# Altium PCB Toradex_Colibri 5.0.PcbDoc (part 1 of 2)
Units mm, origin at the board's own origin, x right, y up, seen from the top; angles counter-clockwise.
Board outline 200 x 150 mm, 4 copper layers (Top Layer, Layer 1, Layer 2, Bottom Layer), stack 1.531 mm thick; 271 components, 262 nets, 1242 pads, 9 vias.
Unrouted connection lines stored in the file: 729.
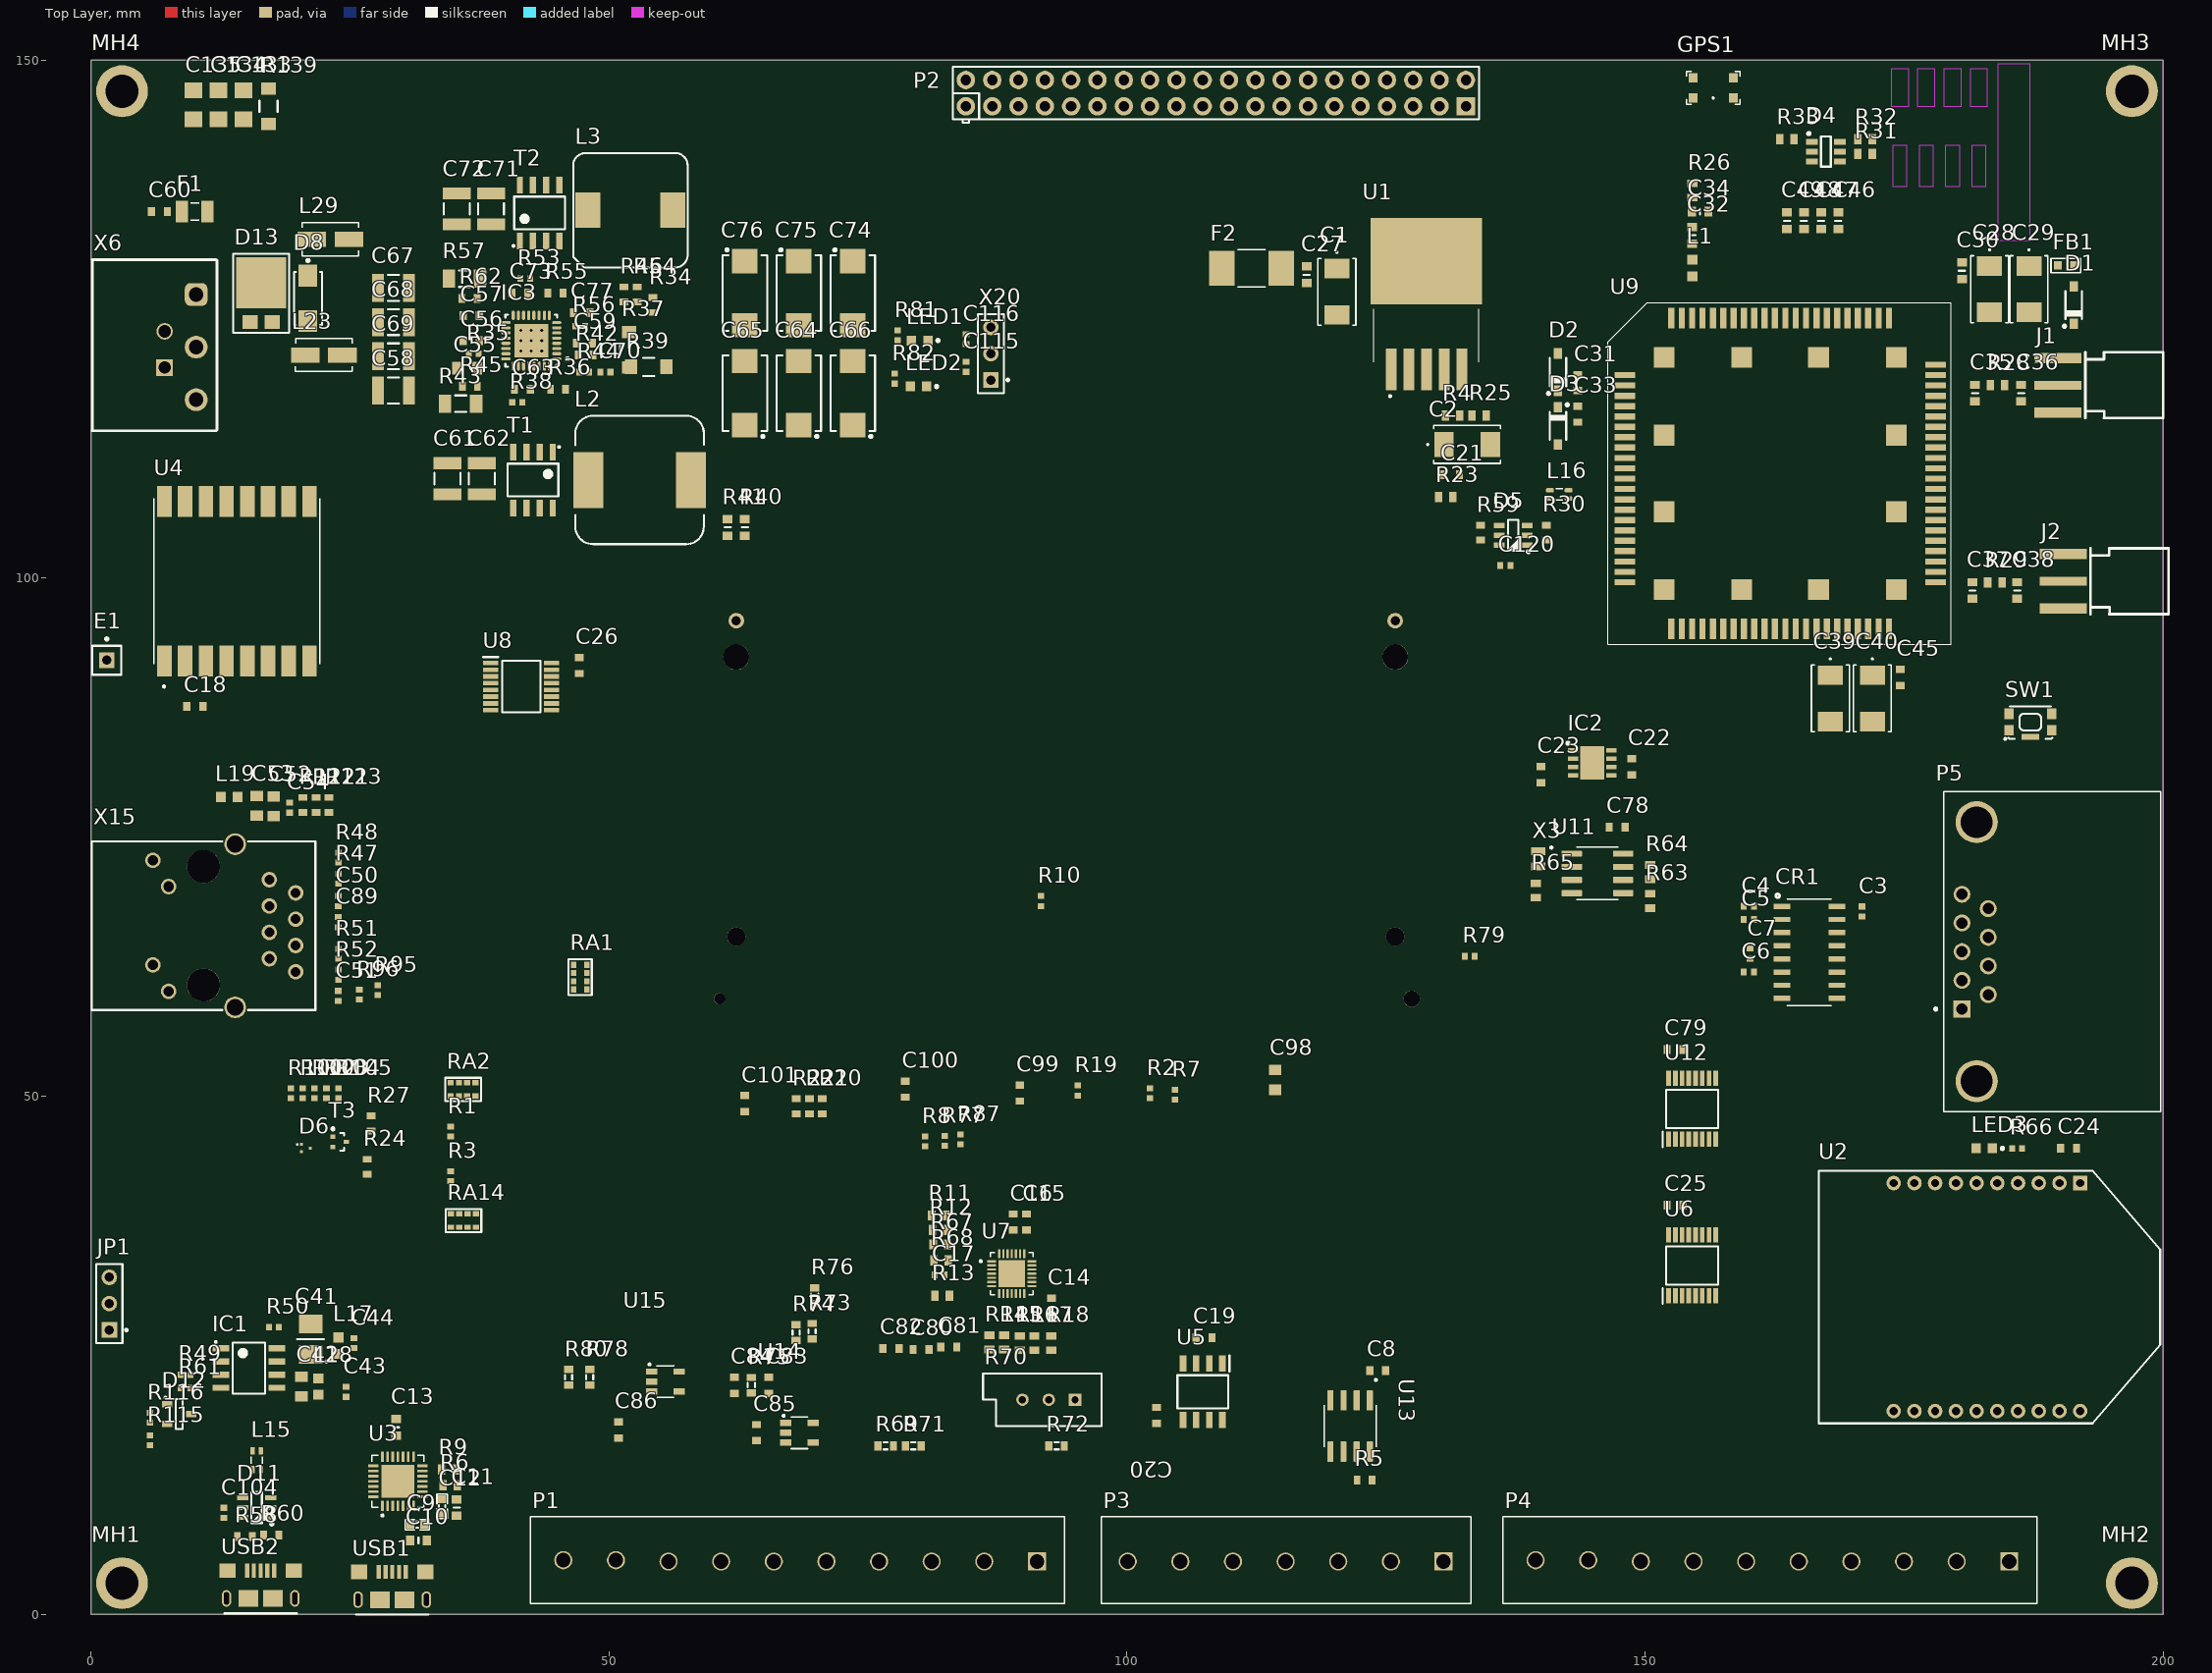
[diagram p0: Top Layer view]
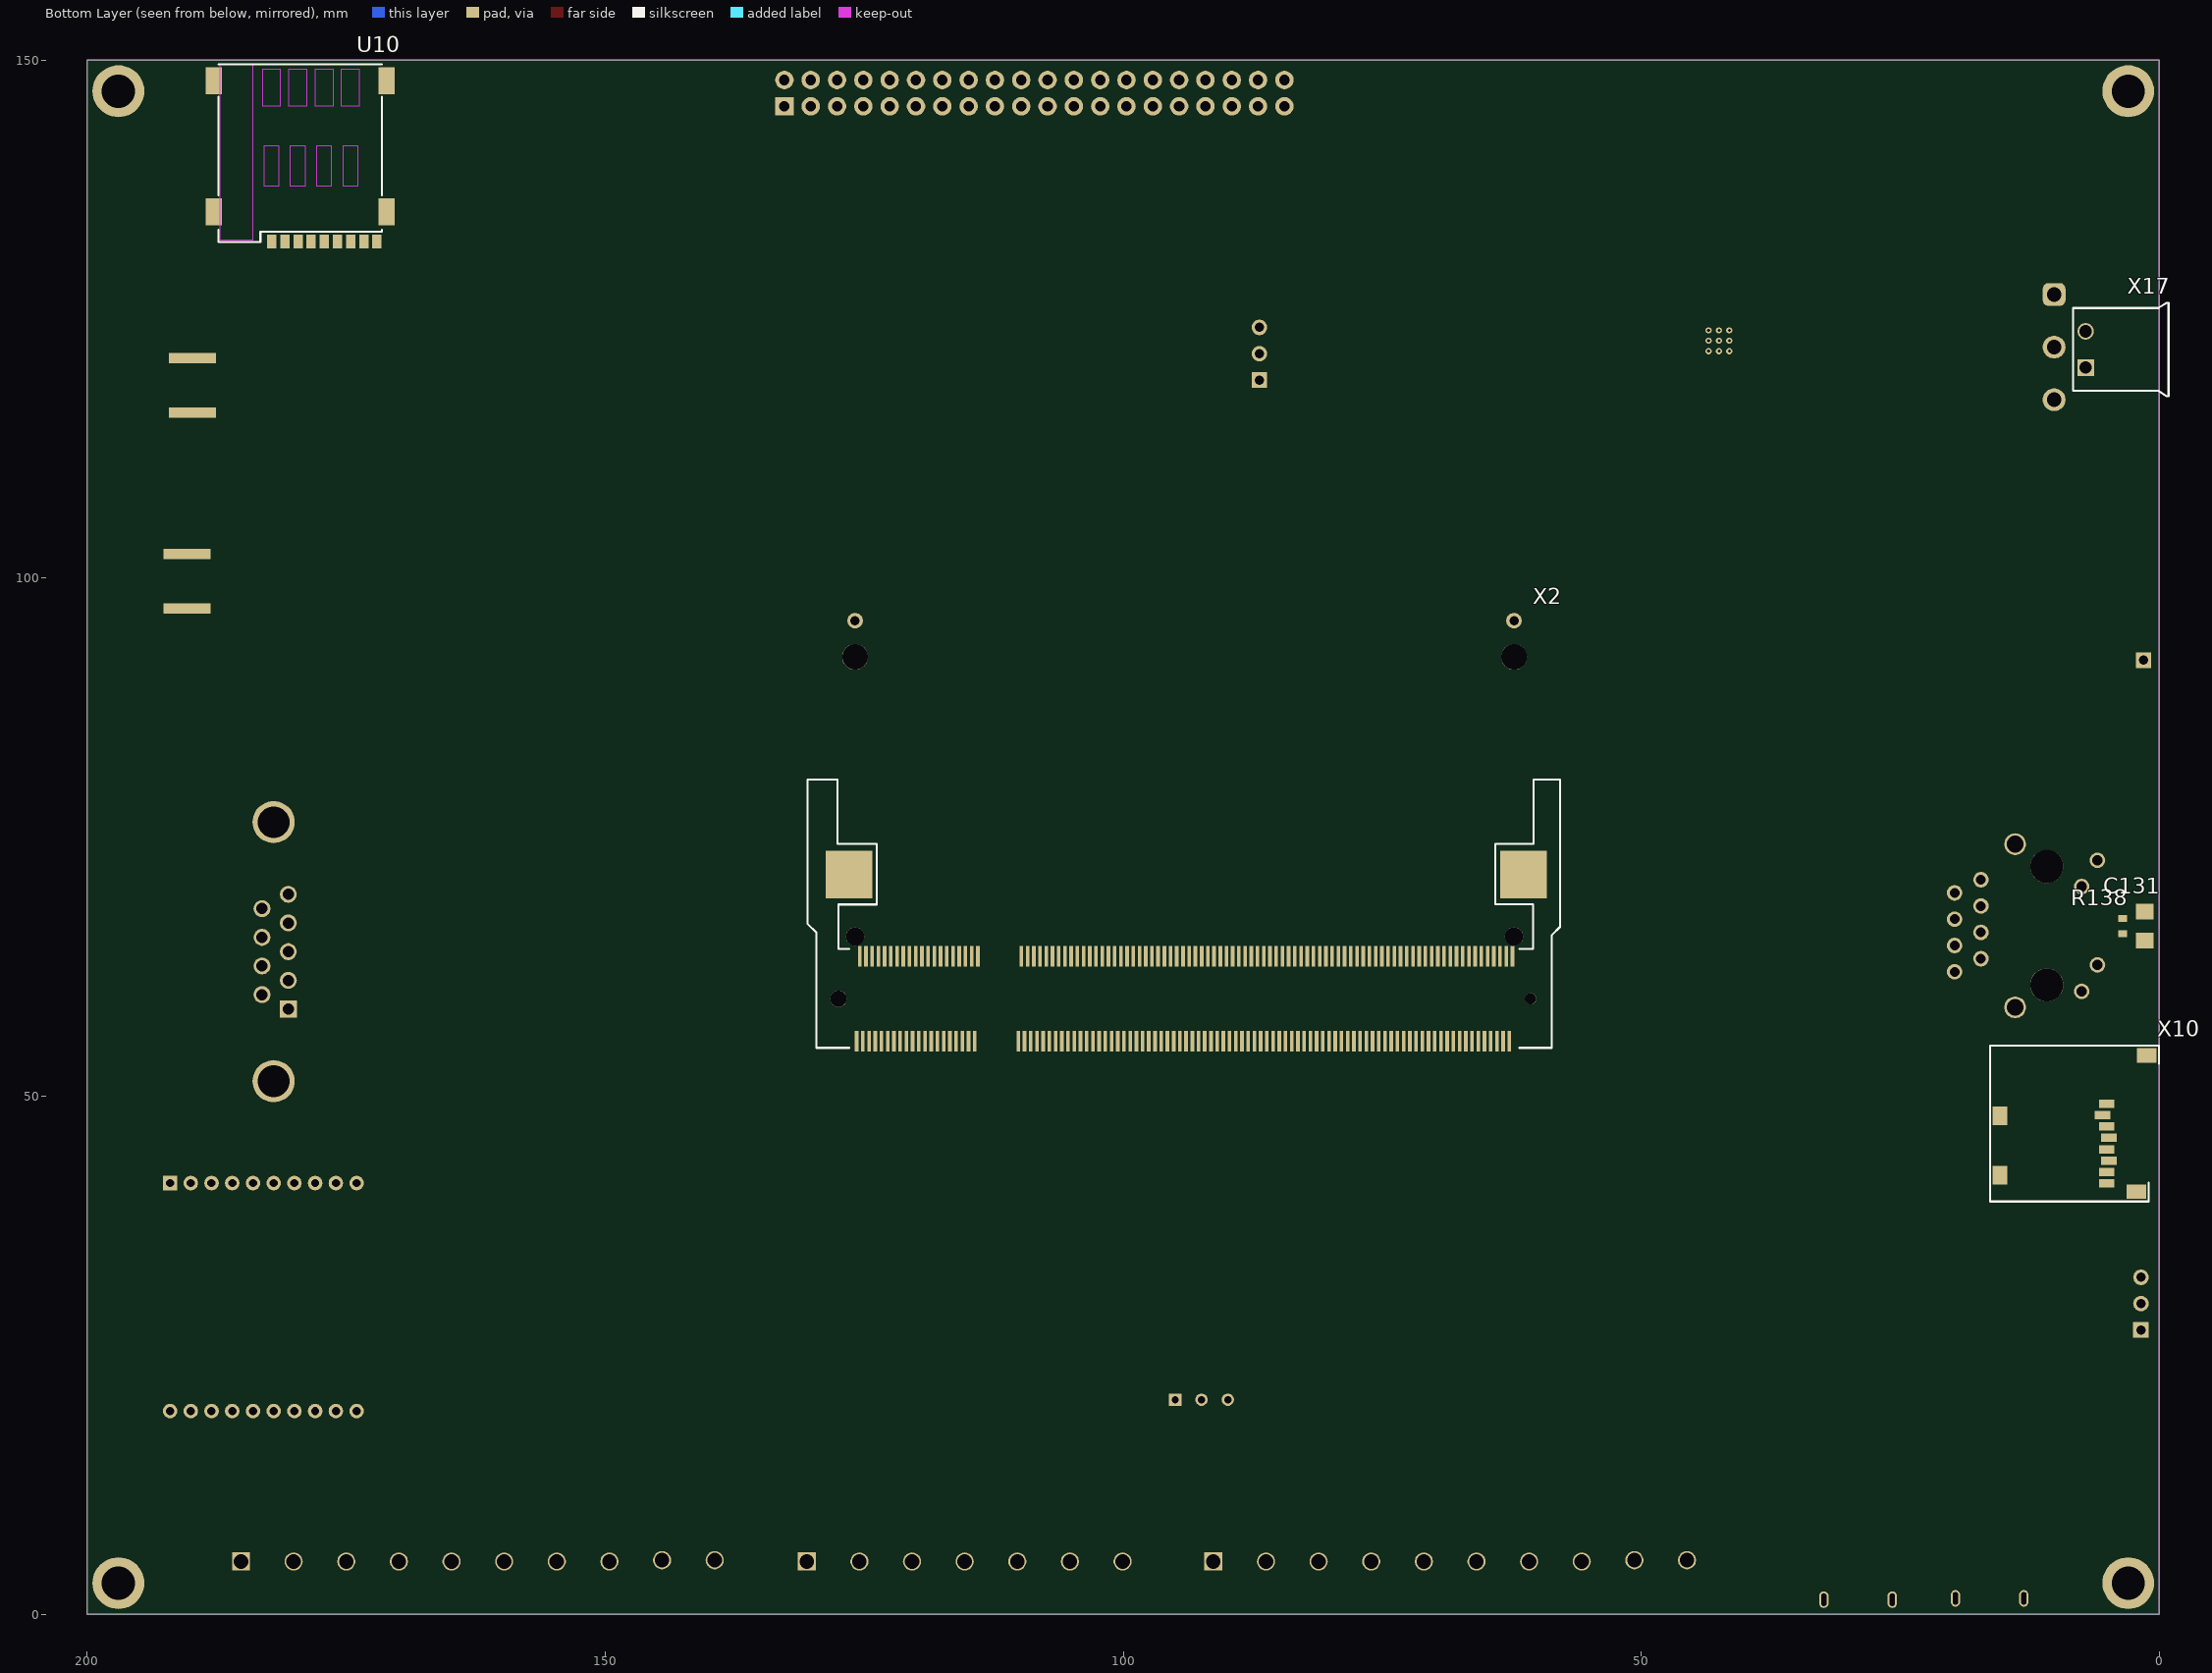
[diagram p1: Bottom Layer view, seen from below]

## Layer stack, top to bottom
Top Solder: solder mask 0.0508, Solder Resist, Dk 3.5
Top Layer: signal copper 0.047
Dielectric 2: prepreg 0.0483, PP-006, Dk 4.1
Dielectric 4: core 0.0734, Core-009, Dk 4.5
Layer 1: signal copper 0.032
Dielectric 1: dielectric 1.1298, FR-4, Dk 4.8
Layer 2: signal copper 0.032
Dielectric 5: core 0.0734, Core-009, Dk 4.5
Dielectric 3: prepreg 0.0483, PP-006, Dk 4.1
Bottom Layer: signal copper 0.047
Bottom Solder: solder mask 0.0508, Solder Resist, Dk 3.5

## Board outline
0,0 200,0 200,150 0,150

## Design rules (kind name [scope] priority, off if disabled: settings)
Clearance [All] p1: gap=0.11 ignorepadtopadclearanceinfootprint=FALSE except(0: Arc-Hole Track-Hole SMDPad-Hole THPad-Hole Via-Hole Fill-Hole Poly-Hole Region-Hole Text-Hole)
ComponentClearance [All] p1: gap=0 collisioncheckmode=3 verticalgap=0 showdistances=FALSE
DiffPairsRouting [All] p1: maxlimit=0.254 minlimit=0.254 mostfreqgap=0.254 toplayer_minwidth=0.381 toplayer_maxwidth=0.381 toplayer_prefwidth=0.381 midlayer1_minwidth=0.381 midlayer1_maxwidth=0.381 midlayer1_prefwidth=0.381 midlayer2_minwidth=0.381 midlayer2_maxwidth=0.381 midlayer2_prefwidth=0.381 bottomlayer_minwidth=0.381 bottomlayer_maxwidth=0.381 bottomlayer_prefwidth=0.381 maxuncoupledlength=12.7
PolygonConnect [All] p1: connectstyle=Relief reliefconductorwidth=0.254 reliefentries=4 polygonreliefangle="90 Angle" airgapwidth=0.254
RoutingVias [All] p1: holewidth=0.711 width=1.27 viastyle="Through Hole" minholewidth=0.711 minwidth=1.27 maxholewidth=0.711 maxwidth=1.27
SolderMaskExpansion [All] p1: expansion=0.102 istentingtop=FALSE
Width [All] p1: maxlimit=0.254 minlimit=0.254 preferedwidth=0.254
28 further rules are at their usual default settings.

## Classes and differential pairs
net class "50 Ohm": ANT_AUX ANT_GNSS ANT_MAIN NetC32_1 NetC32_2 NetC36_2 NetC38_2 NetGPS1_1
component class L506: C1 C2 C21 C27 C28 C29 C30 C31 C32 C33 C34 C35 C36 C37 C38 C39 C40 C45 C46 C47 C48 C49 D1 D2 D3 D4 F2 FB1 GPS1 J1 J2 L1 R4 R23 R25 R26 R28 R29 R31 R32 R33 U1 U9 U10
net class USB[0..6]: USB0 USB1 USB2 USB3 USB4 USB5 USB6
net class SD[0..6]: SD0 SD1 SD2 SD3 SD4 SD5 SD6
component class Zigbee: C3 C4 C5 C6 C7 C24 CR1 LED3 P3 P4 P5 R66 U2
component class USB: C41 C42 C43 C44 C104 C120 D5 D11 D12 IC1 L15 L16 L17 L18 R8 R30 R49 R50 R58 R59 R60 R61 R77 R87 R115 R116 USB2
component class SPI: C14 C15 C16 C17 C26 C80 C81 C82 P2 R11 R12 R13 R14 R15 R16 R17 R18 R67 R68 U7 U8
component class Serial: C25 C79 U6 U12
component class SDCard: D6 R1 R3 R24 R27 R101 R102 R103 R104 R105 RA2 RA14 T3 X10
component class RTC: C22 C23 C78 IC2 R63 R64 R65 RA1 U11 X3
component class PowerSupply: C55 C56 C57 C58 C59 C60 C61 C62 C63 C64 C65 C66 C67 C68 C69 C70 C71 C72 C73 C74 C75 C76 C77 C115 C116 C133 C134 C135 D8 D13 F1 IC3 L2 L3 L23 L29 LED1 LED2 MH1 MH2 MH3 MH4 R34 R35 R36 R37 R38 R39 R40 R41 R42 R43 R44 R45 R46 R53 R54 R55 R56 R57 R62 R81 R82 R139 T1 T2 X6 X17 X20
component class Other: C19 C20 U5
component class LoRa: C18 E1 U4
component class Ethernet: C50 C51 C52 C53 C54 C89 C131 L19 R47 R48 R51 R52 R95 R96 R121 R122 R123 R138 X15
component class DebugConsole: C8 C9 C10 C11 C12 C13 R5 R6 R9 U3 U13 USB1
component class Colibri: C98 C99 C100 C101 JP1 R2 R7 R10 R19 R20 R21 R22 R79 SW1 X2
component class Analog_Inputs: C83 C84 C85 C86 P1 R69 R70 R71 R72 R73 R74 R75 R76 R78 R80 U14 U15
differential pair USBH: +USBH_P -USBH_N
differential pair USBC: +USBC_P -USBC_N
differential pair USB_HOST: +USB_HOST_P -USB_HOST_N
differential pair USB_CLIENT: +USB_CLIENT_P -USB_CLIENT_N
differential pair RS485_TX: +RS485_TX_P -RS485_TX_N
differential pair RS485_RX: +RS485_RX_P -RS485_RX_N

## Components (designator, comment, footprint, x,y, rotation, side; value= is the part's Value field where it differs from the comment)
C1 "100uF" "2312 Tant" 120.269,127.635 r270 top
C2 "330uF" "2312 Tant" 132.842,112.903 r0 top
C3 "100pF" CAPC1005X60N 170.942,67.818 r270 top
C4 "100pF" CAPC1005X60N 160.02,68.326 r0 top
C5 "100pF" CAPC1005X60N 160.02,67.056 r0 top
C6 "100pF" CAPC1005X60N 160.02,61.976 r0 top
C7 "100pF" CAPC1005X60N 160.147,63.754 r90 top
C8 "100nF" T_CAPC0603X33N 124.206,23.495 r0 top
C9 "100nF" CAPC1608X06L 31.496,8.636 r0 top
C10 "4.7uF" CAPC1608X100N 31.623,7.112 r0 top
C11 "1uF" CAPC1608X100N 35.306,10.287 r270 top
C12 "100nF" CAPC1608X06L 33.896,10.414 r270 top
C13 "4.7uF" CAPC1608X100N 29.464,18.034 r90 top
C14 "100nF" T_CAPC0603X33N 92.71,29.718 r90 top
C15 "100nF" T_CAPC0603X33N 90.297,37.846 r270 top
C16 "100nF" T_CAPC0603X33N 89.027,37.846 r270 top
C17 "1nF" CAPC1005X60N 81.915,32.766 r0 top
C18 "100nF" T_CAPC0603X33N 10.033,87.63 r0 top
C19 "100nF" T_CAPC0603X33N 107.442,26.67 r180 top
C20 "100nF" T_CAPC0603X33N 102.87,19.177 r270 top
C21 "100nF" T_CAPC0603X33N 131.318,109.982 r180 top
C22 "100nF" T_CAPC0603X33N 148.717,81.788 r90 top
C23 "100nF" T_CAPC0603X33N 139.954,81.026 r90 top
C24 "100nF" T_CAPC0603X33N 190.881,44.958 r0 top
C25 "100nF" T_CAPC0603X33N 152.908,39.497 r180 top
C26 "100nF" T_CAPC0603X33N 47.117,91.567 r90 top
C27 "1uF" CAPC1608X100N 117.348,129.286 r270 top
C28 "100uF" "2312 Tant" 183.261,127.889 r270 top
C29 "100uF" "2312 Tant" 187.071,127.889 r270 top
C30 "1uF" CAPC1608X100N 180.594,129.667 r270 top
C31 "100nF" T_CAPC0603X33N 143.51,118.872 r270 top
C32 "0.8pF" CAPC1608X100N 154.559,133.096 r90 top
C33 "100nF" T_CAPC0603X33N 143.51,115.824 r90 top
C34 "5.1pF" CAPC1608X100N 155.321,135.382 r180 top
C35 "NF" CAPC1608X100N 181.864,117.856 r90 top
C36 "NF" CAPC1608X100N 186.309,117.856 r90 top
C37 "NF" CAPC1608X100N 181.61,98.806 r90 top
C38 "NF" CAPC1608X100N 185.928,98.806 r90 top
C39 "100uF" "2312 Tant" 167.894,88.392 r270 top
C40 "100uF" "2312 Tant" 171.958,88.392 r270 top
C41 "100uF" CAPMP3528X210N 21.209,26.543 r90 top
C42 "22uF" T_CAPC0805X125N 20.32,21.971 r90 top
C43 "100nF" CAPC1005X60N 24.638,21.463 r270 top
C44 "100nF" CAPC1005X60N 25.4,26.162 r90 top
C45 "100nF" T_CAPC0603X33N 174.625,90.424 r90 top
C46 "0603" CAPC1608X100N 168.656,134.493 r270 top
C47 "0603" CAPC1608X100N 167.005,134.493 r270 top
C48 "0603" CAPC1608X100N 165.354,134.493 r270 top
C49 "0603" CAPC1608X100N 163.703,134.493 r270 top
C50 "100nF" CAPC1005X60N 23.876,68.834 r90 top
C51 "100nF" CAPC1005X60N 23.876,59.672 r90 top
C52 "47uF" T_CAPC0805X125N 17.653,77.978 r270 top
C53 "47uF" T_CAPC0805X125N 16.002,78.006 r270 top
C54 "100nF" CAPC1005X60N 19.177,77.851 r270 top
C55 "10uF" T_CAPC0805X125N 36.322,120.269 r0 top
C56 "1uF" T_CAPC0603X33N 36.703,122.936 r0 top
C57 "10uF" T_CAPC0603X33N 36.703,125.349 r0 top
C58 "22uF" CAPC3225X160N 29.21,118.11 r0 top
C59 "1nF" T_CAPC0603X33N 47.625,122.682 r180 top
C60 "100nF" T_CAPC0603X33N 6.604,135.382 r0 top
C61 "10uF" CAPC3225X160N 34.417,109.601 r90 top
C62 "10uF" CAPC3225X160N 37.719,109.601 r90 top
C63 "100nF" T_CAPC0603X33N 41.656,118.237 r0 top
C64 "150uF" CAPMP7343X310N 68.326,117.856 r90 top
C65 "150uF" CAPMP7343X310N 63.119,117.856 r90 top
C66 "150uF" CAPMP7343X310N 73.533,117.856 r90 top
C67 "10uF" CAPC3225X160N 29.21,128.016 r0 top
C68 "10uF" CAPC3225X160N 29.21,124.714 r0 top
C69 "10uF" CAPC3225X160N 29.21,121.412 r0 top
C70 "2.7nF" CAPC1005X60N 49.657,119.888 r180 top
C71 "10uF" CAPC3225X160N 38.608,135.636 r90 top
C72 "10uF" CAPC3225X160N 35.306,135.636 r90 top
C73 "100nF" T_CAPC0603X33N 41.402,127.508 r0 top
C74 "150uF" CAPMP7343X310N 73.533,127.508 r270 top
C75 "150uF" CAPMP7343X310N 68.326,127.508 r270 top
C76 "150uF" CAPMP7343X310N 63.119,127.508 r270 top
C77 "1nF" T_CAPC0603X33N 47.371,125.603 r0 top
C78 "100nF" T_CAPC0603X33N 147.32,75.946 r0 top
C79 "100nF" T_CAPC0603X33N 152.908,54.483 r180 top
C80 "100nF" T_CAPC0603X33N 80.137,25.527 r180 top
C81 "100nF" T_CAPC0603X33N 82.804,25.781 r180 top
C82 "100nF" T_CAPC0603X33N 77.216,25.654 r180 top
C83 "100nF" T_CAPC0603X33N 65.405,22.098 r90 top
C84 "100nF" T_CAPC0603X33N 62.103,22.098 r270 top
C85 "100nF" T_CAPC0603X33N 64.262,17.526 r90 top
C86 "100nF" T_CAPC0603X33N 50.927,17.78 r90 top
C89 "100nF" CAPC1005X60N 23.876,66.802 r270 top
C98 "22uF" T_CAPC0805X125N 114.3,51.562 r90 top
C99 "4.7uF" T_CAPC0603X33N 89.662,50.292 r90 top
C100 "4.7uF" T_CAPC0603X33N 78.613,50.673 r90 top
C101 "4.7uF" T_CAPC0603X33N 63.119,49.276 r90 top
C104 "100nF" CAPC1005X60N 12.827,9.779 r90 top
C115 "100nF" CAPC1005X60N 84.455,120.396 r270 top
C116 "100nF" CAPC1005X60N 84.455,123.063 r270 top
C120 "100nF" CAPC1005X60N 136.525,101.219 r180 top
C131 "1nF" T_CAPC1206X180N 1.397,66.421 r90 bottom
C133 "1nF" T_CAPC1206X180N 14.732,145.669 r270 top
C134 "1nF" T_CAPC1206X180N 12.319,145.669 r270 top
C135 "1nF" T_CAPC1206X180N 9.906,145.669 r270 top
CR1 "ST3232EBDR" SO-16_STM 165.862,63.881 r0 top
D1 "MMSZ5231B-TP" SOD3715X145N 191.389,126.365 r90 top
D2 "TVS" SOD3715X145N 141.605,119.888 r90 top
D3 "TVS" SOD3715X145N 141.605,114.681 r270 top
D4 "ESDA6V1-5SC6" SOT95P280X100-6N 167.466,141.163 r0 top
D5 "RCLAMP0504S" T_SOT95P285X90-6N 137.287,104.14 r180 top
D6 "TPD2EUSB30DRTR" T_TI_TPD2EUSB30DRTR 20.745,44.989 r0 top
D8 "D-Littelfuse-SMAJ30CA-Schottky" T_LITTLEFUSE_SMAJ30CA 20.955,127 r270 top
D11 "RCLAMP0504S" T_SOT95P285X90-6N 16.002,10.287 r180 top
D12 "BAT54C" SOT95P230X110-3N 8.509,19.304 r0 top
D13 "SS8P6C-M3/86A" T_DIOM_TO277A 16.432,128.519 r270 top
E1 "142-0701-801" PIN1 1.524,92.075 r0 top
F1 "8A" T_Littelfuse_0458 10.033,135.382 r0 top
F2 "Fuse 1" SSQC_BEL 112.141,130.048 r0 top
FB1 "FBTH1608HL300-T" IND-0603 190.627,130.175 r180 top
GPS1 "1462350001" 1462350001 156.591,147.32 r0 top
IC1 "TPS2042BD" SOIC127P600X173-8N 15.24,23.749 r0 top
IC2 "A7101CHTK2_T0BC2VJ" SON80P400X400X100-9N-D 144.907,82.169 r0 top
IC3 "TPS51120" QFN50P500X500X100-33N 42.508,122.916 r180 top
J1 "EMPCB.SMAFSTJ.B.HT" EMPCB.SMAFSTJ.B.HT 189.865,118.618 r90 top
J2 "EMPCB.SMAFSTJ.B.HT" EMPCB.SMAFSTJ.B.HT 190.373,99.695 r90 top
JP1 "826936-3" T_TYCO_826936-3 1.778,27.432 r90 top
L1 "3.3nH" INDC1608X100N 154.559,129.921 r90 top
L2 "8.2uH" T_INDM120120X80N 52.959,109.474 r270 top
L3 "4.7uH" T_INDM102102X45N 52.07,135.509 r90 top
L15 "90R@100MHz" T_Murata_DLW21SN900SQ2 16.002,14.859 r270 top
L16 "90R@100MHz" T_Murata_DLW21SN900SQ2 141.732,108.077 r0 top
L17 "220R@100MHz" INDC1608X95N 23.876,25.908 r90 top
L18 "220R@100MHz" INDC1608X95N 21.971,21.971 r270 top
L19 "220R@100MHz" INDC1608X95N 13.335,78.867 r0 top
L23 "36R@100MHz" T_Laird_35F0121-0SR-10 22.479,121.539 r0 top
L29 "36R@100MHz" T_Laird_35F0121-0SR-10 23.114,132.715 r0 top
LED1 "LED" LEDC1608X80N 80.01,122.936 r180 top
LED2 "LED" LEDC1608X80N 79.883,118.491 r180 top
LED3 "LED" LEDC1608X80N 182.753,44.958 r180 top
MH1 "MECH-MountingHoles" T_MountingHoles 3,3 r0 top
MH2 "MECH-MountingHoles" T_MountingHoles 197,3 r0 top
MH3 "MECH-MountingHoles" T_MountingHoles 197,147 r0 top
MH4 "MECH-MountingHoles" T_MountingHoles 3,147 r0 top
P1 "MB612-50810" "1729186 5.08 - 10pos" 73.533,5.207 r180 top
P2 "Raspbbery Pi" RASPI_GPIO_B+ 108.585,146.812 r90 top
P3 "MB612-50807" MB612-50807 115.316,5.08 r180 top
P4 "MB612-50810" "1729186 5.08 - 10pos" 167.386,5.207 r180 top
P5 "RS232" 2301843-1 180.599,58.407 r90 top
R1 "22R" RESC1005X40N 34.722,46.579 r90 top
R2 "22R" RESC1005X40N 102.235,50.292 r270 top
R3 "22R" RESC1005X40N 34.722,42.261 r90 top
R4 "100K" RESC1608X50N 131.445,115.697 r0 top
R5 "120R" T_RESC0603X30N 122.936,12.954 r0 top
R6 "10K" RESC1608X50N 34.671,12.446 r180 top
R7 "22R" RESC1005X40N 104.648,50.137 r270 top
R8 "22R" RESC1005X40N 80.518,45.621 r270 top
R9 "10K" RESC1608X50N 34.544,13.97 r0 top
R10 "22R" RESC1005X40N 91.694,68.834 r90 top
R11 "1K" RESC1608X50N 81.843,38.481 r0 top
R12 "1K" RESC1608X50N 81.915,37.084 r0 top
R13 "1K" RESC1608X50N 82.169,30.734 r0 top
R14 "1K" RESC1608X50N 86.741,26.234 r90 top
R15 "1K" RESC1608X50N 88.138,26.234 r90 top
R16 "1K" RESC1608X50N 89.662,26.162 r90 top
R17 "1K" RESC1608X50N 91.059,26.162 r90 top
R18 "1K" RESC1608X50N 92.71,26.162 r90 top
R19 "10K" RESC1005X40N 95.25,50.546 r270 top
R20 "100R" T_RESC0603X30N 70.612,49.022 r90 top
R21 "100R" T_RESC0603X30N 69.342,49.022 r90 top
R22 "100R" T_RESC0603X30N 68.072,49.022 r90 top
R23 "470R" RESC1608X50N 130.755,107.823 r0 top
R24 "100K" T_RESC0603X30N 26.67,43.18 r90 top
R25 "47K" RESC1608X50N 133.985,115.697 r0 top
R26 "0R" RESC1608X50N 154.559,137.414 r90 top
R27 "100K" T_RESC0603X30N 27.051,47.371 r90 top
R28 "0R" RESC1608X50N 184.023,118.618 r0 top
R29 "0R" RESC1608X50N 183.769,99.568 r0 top
R30 "15K" T_RESC0603X30N 140.462,104.394 r90 top
R31 "51R" RESC1608X50N 171.251,140.97 r180 top
R32 "51R" RESC1608X50N 171.251,142.367 r180 top
R33 "51R" RESC1608X50N 163.703,142.367 r0 top
R34 "0R" T_RESC0603X30N 54.229,126.365 r90 top
R35 "4.7R" RESC1005X40N 36.957,121.666 r0 top
R36 "0R" T_RESC0603X30N 45.085,118.237 r180 top
R37 "0R" T_RESC3216X760N 51.943,122.047 r270 top
R38 "4.7R" RESC1005X40N 41.148,116.967 r180 top
R39 "0R" T_RESC3216X760N 53.848,120.396 r180 top
R40 "0R" CAPC1608X100N 63.119,104.902 r270 top
R41 "0R" CAPC1608X100N 61.468,104.902 r270 top
R42 "100K" T_RESC0603X30N 47.752,121.539 r180 top
R43 "15mR" RESC3316X76N 35.687,116.84 r180 top
R44 "6.2K" RESC1005X40N 47.625,119.888 r180 top
R45 "3.6K" T_RESC0603X30N 36.576,118.491 r180 top
R46 "0R" T_RESC0603X30N 51.435,127.381 r90 top
R47 "49.9R" RESC1005X40N 23.876,70.993 r90 top
R48 "49.9R" RESC1005X40N 23.876,73.025 r90 top
R49 "100K" RESC1005X40N 9.144,23.114 r180 top
R50 "100K" RESC1005X40N 17.653,27.686 r180 top
R51 "49.9R" RESC1005X40N 23.876,63.754 r270 top
R52 "49.9R" RESC1005X40N 23.876,61.722 r270 top
R53 "4.7R" RESC1005X40N 41.91,128.905 r0 top
R54 "0R" T_RESC0603X30N 52.705,127.381 r90 top
R55 "100K" T_RESC0603X30N 44.831,127.508 r0 top
R56 "10K" RESC1005X40N 47.216,124.333 r180 top
R57 "24mR" RESC3316X76N 36.068,128.905 r180 top
R58 "15K" T_RESC0603X30N 14.859,7.493 r0 top
R59 "15K" T_RESC0603X30N 134.112,104.394 r90 top
R60 "15K" T_RESC0603X30N 17.399,7.62 r180 top
R61 "100K" RESC1005X40N 9.144,21.844 r180 top
R62 "3.3K" T_RESC0603X30N 36.539,127 r180 top
R63 "10k" RESC1608X50N 150.495,68.834 r270 top
R64 "10k" RESC1608X50N 150.495,71.628 r90 top
R65 "10k" RESC1608X50N 139.446,69.85 r270 top
R66 "200" RESC1005X40N 185.928,44.958 r0 top
R67 "1K" RESC1608X50N 81.987,35.687 r0 top
R68 "1K" RESC1608X50N 82.042,34.163 r0 top
R69 "Res3" J1-0603 76.708,16.256 r0 top
R70 "RPot" VR5 92.456,20.701 r180 top
R71 "Res3" J1-0603 79.375,16.256 r0 top
R72 "Res3" J1-0603 93.206,16.256 r180 top
R73 "Res3" J1-0603 69.596,27.305 r270 top
R74 "Res3" J1-0603 68.072,27.178 r90 top
R75 "Res3" J1-0603 63.754,22.098 r90 top
R76 "Res3" J1-0603 69.85,30.734 r90 top
R77 "22R" RESC1005X40N 82.423,45.692 r270 top
R78 "Res3" J1-0603 48.133,22.86 r90 top
R79 "22R" RESC1005X40N 133.096,63.5 r0 top
R80 "Res3" J1-0603 46.101,22.86 r90 top
R81 "560R" RESC1005X40N 77.851,123.444 r90 top
R82 "1K" RESC1005X40N 77.597,119.253 r90 top
R87 "22R" RESC1005X40N 83.947,45.819 r270 top
R95 "150R" RESC1005X40N 27.686,60.226 r90 top
R96 "150R" RESC1005X40N 25.908,59.817 r270 top
R101 "33K" RESC1005X40N 19.304,50.292 r90 top
R102 "68K" RESC1005X40N 20.447,50.292 r90 top
R103 "68K" RESC1005X40N 21.59,50.292 r90 top
R104 "68K" RESC1005X40N 22.733,50.292 r90 top
R105 "68K" RESC1005X40N 23.876,50.292 r90 top
R115 "560R" RESC1005X40N 5.715,16.764 r90 top
R116 "1K" RESC1005X40N 5.715,18.951 r90 top
R121 "0R" T_RESC0603X30N 21.717,78.105 r90 top
R122 "0R" T_RESC0603X30N 20.447,78.105 r270 top
R123 "0R" T_RESC0603X30N 22.987,78.105 r270 top
R138 "1M" T_RESC0603X30N 3.556,66.421 r90 bottom
R139 "0R" T_RESC3216X760N 17.145,145.542 r90 top
RA1 "22R" T_Resistor_Array_X4 46.579,62.687 r0 top
RA2 "22R" T_Resistor_Array_X4 34.722,50.008 r90 top
RA14 "22R" T_Resistor_Array_X4 34.76,37.338 r90 top
SW1 "KMR211GLFS" T_CnK_KMR211GLFS 187.198,86.106 r180 top
T1 "FDS6982AS" SOIC127P600X173-8N 42.672,109.474 r270 top
T2 "FDS6982AS" SOIC127P600X173-8N 43.307,135.255 r90 top
T3 "T-DiodeInc-DMG1012T" T_SOT50P160X80-3N 24.003,45.593 r0 top
U1 "MIC29302WU" MIC29302WU 128.905,120.142 r0 top
U2 "XBP9B-DMST-002" DIP2200W51P200L3294H279Q20P 183.261,30.607 r270 top
U3 "CP2102-GM" QFN50P500X500X100-29N 29.634,12.827 r90 top
U4 "RFM95W-915S2" XCVR_RFM95W-915S2 14.097,99.695 r90 top
U5 "TLE9251VSJXUMA1" SOIC127P602X173-8N 107.315,21.463 r270 top
U6 "74CBTLV3257PGG" SOP65P640X120-16N 154.559,33.655 r90 top
U7 "MAX11410ATI+" QFN40P400X400X80-29N 88.881,32.863 r0 top
U8 "74CBTLV3257PGG" SOP65P640X120-16N 41.529,89.535 r0 top
U9 "L056" L506 163.054,110.102 r0 top
U10 "SIM7100-8-1-15-00-A_revA" SIM7100-8-1-15-00-A_revA 179.451,140.716 r0 bottom
U11 "DS1337S+T&R" SOIC127P600X175-8N 145.415,71.501 r0 top
U12 "74CBTLV3257PGG" SOP65P640X120-16N 154.559,48.768 r90 top
U13 "ISL83490IBZ" SOIC127P600X175-8N 121.539,18.161 r270 top
U14 "MCP6001RT-I/OT" SOT-23-5 68.453,17.526 r0 top
U15 "MCP6001RT-I/OT" SOT-23-5 55.499,22.479 r0 top
USB1 "10118193-0001LF" 10118193-0001LF 29.083,1.397 r0 top
USB2 "10118193-0001LF" 10118193-0001LF 16.383,1.524 r0 top
X2 "1473005-1" T_Tyco_1473005-1 125.743,55.3 r90 bottom
X3 "32.768kHz" ABS06 139.7,72.898 r90 top
X6 "RAPC722X" CTBP9358/3 10.16,122.301 r270 top
X10 "MicroSD Holder" T_Wurth_693071010811 15.78,40.336 r270 bottom
X15 "JX0011D21BNL" T_Pulse_J00-0065NL 0.073,58.316 r90 top
X17 "284512-2" T_TYCO_284512-2 -0.888,118.075 r90 bottom
X20 "826936-3" T_TYCO_826936-3 86.868,119.126 r90 top

## Footprints (in the part's own frame and the unit in brackets; to place one, negate y for a bottom-side part, rotate by r counter-clockwise, add the part's x,y. Pads: shape width x height; smd on the part's side, far side on the other; paste and mask are expansions set on the pad)
"2312 Tant" [mil]
  rect 74x95 smd: 1(-87.99,0) 2(88.01,0)
  silkscreen extent -153,-72 127,72, body extent -122,-67 122,67, height 112
"1729186 5.08 - 10pos" [mm]
  rect 1.75x1.75 hole 1.4: 1(-17.78,0.127)
  round 1.75 hole 1.4: 2(-12.7,0.127) 3(-7.62,0.127) 4(-2.54,0.127) 5(2.54,0.127) 6(7.62,0.127) 7(12.7,0.127) 8(17.78,0.127) 9(22.86,0) 10(27.94,0)
  silkscreen extent -20.45,-4.19 31.11,4.19, body extent -20.35,-4.06 31.02,4.04, height 10
2301843-1 [mm]
  rect 1.635x1.635 hole 1.09: 1(0,0)
  round 1.635 hole 1.09: 2(2.77,0) 3(5.54,0) 4(8.31,0) 5(11.08,0) 6(1.39,-2.54) 7(4.16,-2.54) 8(6.92,-2.54) 9(9.69,-2.54)
  round 4.066 hole 3.05: S1(-6.96,-1.42) S2(18.04,-1.42)
  silkscreen extent -9.91,-19.18 20.99,2.64, body extent -9.82,-19.05 20.99,1.6, height 14.41
10118193-0001LF [mm] "Connector Receptacle USB - micro B 2.0 5 Position Surface Mount, Right Angle, Horizontal"
  rect 0.4x1.35 smd: 1(-1.3,2.675) 2(-0.65,2.675) 3(0,2.675) 4(0.65,2.675) 5(1.3,2.675)
  oval 0.9x1.6 hole 0.5 slot 1.2 at 90 deg: 6(-3.3,0) 6(3.3,0)
  rect 1.6x1.4 smd: 6(-3.2,2.675) 6(3.2,2.675)
  rect 1.9x1.6 smd: 6(-1.2,0) 6(1.2,0)
  silkscreen extent -3.5,-1.45 3.5,-1.45, body extent -3.93,-2.74 3.93,2.92, height 2.83
1462350001 [mm]
  rect 0.87x0.87 smd paste+0: 1(-1.95,-0.97) 2(-1.95,0.97) 2(1.95,-0.97) 2(1.95,0.97)
  Top Layer pour cut-out: -3.734,2.642 3.734,2.642 3.734,-2.642 -3.734,-2.642
  Bottom Layer pour cut-out: -3.734,2.642 3.734,2.642 3.734,-2.642 -3.734,-2.642
  silkscreen extent -2.58,-1.6 2.58,1.6, body extent -2.54,-1.55 2.53,1.52, height 4
ABS06 [mm] "32.768kHz ±20ppm Crystal 4pF 60 kOhm -40°C ~ 85°C Surface Mount 2-SMD, No Lead"
  rect 0.75x1.4 smd: 1(0.762,0) 2(-0.725,0)
  body extent -1,-0.6 1,0.6, height 0.61
CAPC1005X60N [mm] "Ceramic Capacitor 0402 (1005 metric), max height 0.5mm"
  rect 0.58x0.66 smd: 1(-0.49,0) 2(0.49,0)
  body extent -0.5,-0.25 0.5,0.25, height 0.6
CAPC1608X06L [mm]
  rect 0.75x0.8 smd: 1(-0.675,0) 2(0.675,0)
  silkscreen extent -1.17,-0.5 1.17,0.5, body extent -0.8,-0.43 0.8,0.43, height 0.8
CAPC1608X100N [mm] "Capacitor, non-Polarized, Chip; 1.60mm L X 0.80mm W X 1.00mm H, IPC Medium Density"
  rect 0.8x0.95 smd: 1(-0.8,0) 2(0.8,0)
  silkscreen extent 0,-0.3 0,0.3, body extent -0.85,-0.45 0.85,0.45, height 1
CAPC3225X160N [mm]
  rect 1.15x2.7 smd: 1(-1.5,0) 2(1.5,0)
  silkscreen extent -0.55,-1.25 0.55,1.25, body extent -1.6,-1.26 1.6,1.26, height 1.62
CAPMP3528X210N [mm]
  rect 1.8x2.25 smd: 1(-1.45,0) 2(1.45,0)
  silkscreen extent -2.24,-1.6 0,1.3, body extent -1.85,-1.5 1.85,1.5, height 1.9
CAPMP7343X310N [mm]
  rect 2.35x2.45 smd: 1(-3.1,0) 2(3.1,0)
  silkscreen extent -4.3,-2.15 3.65,2.15, body extent -3.8,-2.3 3.8,2.3, height 2.8
CTBP9358/3 [mm] "2 Position Wire to Board Terminal Block Horizontal with Board 0.197\" (5.00mm) Through Hole"
  rrect50% 2.2x2.2 hole 1.4: 1(-5.08,0)
  round 2.2 hole 1.4: 2(0,0) 3(5.08,0)
  silkscreen extent -8.43,-10.03 8.08,2
DIP2200W51P200L3294H279Q20P [mm]
  rect 1.4x1.4 hole 0.8: 1(-11,8.75)
  round 1.4 hole 0.8: 2(-11,6.75) 3(-11,4.75) 4(-11,2.75) 5(-11,0.75) 6(-11,-1.25) 7(-11,-3.25) 8(-11,-5.25) 9(-11,-7.25) 10(-11,-9.25) 11(11,-9.25) 12(11,-7.25) 13(11,-5.25) 14(11,-3.25) 15(11,-1.25) 16(11,0.75) 17(11,2.75) 18(11,4.75) 19(11,6.75) 20(11,8.75)
  silkscreen extent -12.19,-16.47 12.19,16.47, body extent -11.61,-16.59 12.12,16.35, height 13.5
EMPCB.SMAFSTJ.B.HT [mm] "SMA Connector Jack, Female Socket 50 Ohm Board Edge, End Launch Solder"
  rect 0.85x4.56 smd: 1(0,0)
  rect 1x4.56 smd: 2(2.62,0) 3(-2.62,0)
  rect 1x4.56 smd far side: 4(2.62,0) 5(-2.62,0)
  silkscreen extent -3.17,-10.17 3.18,-2.64, body extent -3.18,-12.03 3.17,1.27, height 3.56
IND-0603 [mil] "IND-0603"
  rect 30x32 smd: 1(30.51,0) 2(-30.51,0)
  silkscreen extent -57,-27 57,27, body extent -31,-16 32,16, height 30
INDC1608X95N [mm] "Ferrite Bead 0603 (1608 metric), max height 0.95mm"
  rect 0.95x1 smd: 1(-0.8,0) 2(0.8,0)
  body extent -0.8,-0.4 0.8,0.4, height 0.8
INDC1608X100N [mm] "Chip Inductor, 2-Leads, EIA 0603, Metric 1608, Body 1.6x0.8mm, IPC Medium Density"
  rect 0.95x1 smd: 1(-0.8,0) 2(0.8,0)
  body extent -0.87,-0.47 0.88,0.48, height 1
J1-0603 [mm] "Chip Resistor, Body 1.6x0.8mm, IPC High Density"
  rect 0.7x0.9 smd: 1(-0.75,0) 2(0.75,0)
  silkscreen extent -0.2,-0.35 0.2,0.35, body extent -0.85,-0.48 0.85,0.48, height 0.9
L506 [mm]
  rect 2x0.6 smd: 1(-15,9.5) 2(-15,8.5) 3(-15,7.5) 4(-15,6.5) 5(-15,5.5) 6(-15,4.5) 7(-15,3.5) 8(-15,2.5) 9(-15,1.5) 10(-15,0.5) 11(-15,-0.5) 12(-15,-1.5) 13(-15,-2.5) 14(-15,-3.5) 15(-15,-4.5) 16(-15,-5.5) 17(-15,-6.5) 18(-15,-7.5) 19(-15,-8.5) 20(-15,-9.5) 41(15,-9.5) 42(15,-8.5) 43(15,-7.5) 44(15,-6.5) 45(15,-5.5) 46(15,-4.5) 47(15,-3.5) 48(15,-2.5) 49(15,-1.5) 50(15,-0.5) 51(15,0.5) 52(15,1.5) 53(15,2.5) 54(15,3.5) 55(15,4.5) 56(15,5.5) 57(15,6.5) 58(15,7.5) 59(15,8.5) 60(15,9.5) 81(-15,-10.5) 82(15,-10.5) 85(15,10.5)
  rect 0.6x2 smd: 21(-9.5,-15) 22(-8.5,-15) 23(-7.5,-15) 24(-6.5,-15) 25(-5.5,-15) 26(-4.5,-15) 27(-3.5,-15) 28(-2.5,-15) 29(-1.5,-15) 30(-0.5,-15) 31(0.5,-15) 32(1.5,-15) 33(2.5,-15) 34(3.5,-15) 35(4.5,-15) 36(5.5,-15) 37(6.5,-15) 38(7.5,-15) 39(8.5,-15) 40(9.5,-15) 61(9.5,15) 62(8.5,15) 63(7.5,15) 64(6.5,15) 65(5.5,15) 66(4.5,15) 67(3.5,15) 68(2.5,15) 69(1.5,15) 70(0.5,15) 71(-0.5,15) 72(-1.5,15) 73(-2.5,15) 74(-3.5,15) 75(-4.5,15) 76(-5.5,15) 77(-6.5,15) 78(-7.5,15) 79(-8.5,15) 80(-9.5,15) 83(10.5,-15) 84(-10.5,-15) 86(-10.5,15) 87(10.5,15)
  rect 2x2 smd: 88(-11.2,11.2) 89(-11.2,3.7) 90(-11.2,-3.7) 91(-11.2,-11.2) 92(-3.7,-11.2) 93(3.7,-11.2) 94(11.2,-11.2) 95(11.2,-3.7) 96(11.2,3.7) 97(11.2,11.2) 98(3.7,11.2) 99(-3.7,11.2)
  silkscreen extent -16.64,-16.51 16.51,16.51, body extent -15.11,-15.24 14.99,15.11, height 2.8
LEDC1608X80N [mm]
  rect 0.9x0.95 smd: 1(-0.8,0) 2(0.8,0)
  silkscreen extent -1.88,-0.12 -1.63,0.12, body extent -0.85,-0.45 0.85,0.45, height 0.9
MB612-50807 [mm] "2 Position Wire to Board Terminal Block Horizontal with Board 0.197\" (5.00mm) Through Hole"
  rect 1.75x1.75 hole 1.4: 1(-15.24,0)
  round 1.75 hole 1.4: 2(-10.16,0) 3(-5.08,0) 4(0,0) 5(5.08,0) 6(10.16,0) 7(15.24,0)
  silkscreen extent -17.91,-4.32 17.78,4.06, body extent -17.91,-3.82 17.65,3.68, height 10
MIC29302WU [mm]
  rect 1.041x4.039 smd: 1(-3.404,0) 2(-1.702,0) 3(0,0) 4(1.702,0) 5(3.404,0)
  rect 10.744x8.306 smd: 6(0,10.452)
  silkscreen extent -5.08,-2.67 5.08,5.83, body extent -5.08,0.1 5.08,9.73, height 5.18
PIN1 [mm] "Generic Antenna; 1 Lead"
  rect 1.5x1.5 hole 0.9: 1(0,0)
  silkscreen extent -1.4,-1.4 1.4,2.17
QFN40P400X400X80-29N [mm]
  rrect25% 0.86x0.22 smd: 1(-1.935,1.2) 2(-1.935,0.8) 3(-1.935,0.4) 4(-1.935,0) 5(-1.935,-0.4) 6(-1.935,-0.8) 7(-1.935,-1.2) 15(1.935,-1.2) 16(1.935,-0.8) 17(1.935,-0.4) 18(1.935,0) 19(1.935,0.4) 20(1.935,0.8) 21(1.935,1.2)
  rrect25% 0.22x0.86 smd: 8(-1.2,-1.935) 9(-0.8,-1.935) 10(-0.4,-1.935) 11(0,-1.935) 12(0.4,-1.935) 13(0.8,-1.935) 14(1.2,-1.935) 22(1.2,1.935) 23(0.8,1.935) 24(0.4,1.935) 25(0,1.935) 26(-0.4,1.935) 27(-0.8,1.935) 28(-1.2,1.935)
  rect 2.6x2.6 smd paste-2: 29(0,0)
  silkscreen extent -3.09,-2.05 2.05,2.05, body extent -2.03,-2.03 1.97,1.97, height 0.75
QFN50P500X500X100-29N [mm]
  rect 0.97x0.26 smd: 1(-2.37,1.5) 2(-2.37,1) 3(-2.37,0.5) 4(-2.37,0) 5(-2.37,-0.5) 6(-2.37,-1) 7(-2.37,-1.5) 15(2.37,-1.5) 16(2.37,-1) 17(2.37,-0.5) 18(2.37,0) 19(2.37,0.5) 20(2.37,1) 21(2.37,1.5)
  rect 0.26x0.97 smd: 8(-1.5,-2.37) 9(-1,-2.37) 10(-0.5,-2.37) 11(0,-2.37) 12(0.5,-2.37) 13(1,-2.37) 14(1.5,-2.37) 22(1.5,2.37) 23(1,2.37) 24(0.5,2.37) 25(0,2.37) 26(-0.5,2.37) 27(-1,2.37) 28(-1.5,2.37)
  rect 3.15x3.15 smd: 29(0,0)
  silkscreen extent -3.4,-2.5 2.5,2.5, body extent -2.5,-2.48 2.51,2.52, height 1
QFN50P500X500X100-33N [mm]
  oval 0.9x0.3 smd: 1(-2.45,1.75) 2(-2.45,1.25) 3(-2.45,0.75) 4(-2.45,0.25) 5(-2.45,-0.25) 6(-2.45,-0.75) 7(-2.45,-1.25) 8(-2.45,-1.75) 17(2.45,-1.75) 18(2.45,-1.25) 19(2.45,-0.75) 20(2.45,-0.25) 21(2.45,0.25) 22(2.45,0.75) 23(2.45,1.25) 24(2.45,1.75)
  oval 0.3x0.9 smd: 9(-1.75,-2.45) 10(-1.25,-2.45) 11(-0.75,-2.45) 12(-0.25,-2.45) 13(0.25,-2.45) 14(0.75,-2.45) 15(1.25,-2.45) 16(1.75,-2.45) 25(1.75,2.45) 26(1.25,2.45) 27(0.75,2.45) 28(0.25,2.45) 29(-0.25,2.45) 30(-0.75,2.45) 31(-1.25,2.45) 32(-1.75,2.45)
  rect 3.25x3.25 smd paste-0.595: 33(0,0)
  silkscreen extent -3.63,-2.5 2.5,2.5, body extent -2.58,-2.58 2.58,2.58, height 1
RASPI_GPIO_B+ [mil]
  rect 70x70 hole 39.37: 1(-50,-950)
  round 70 hole 39.37: 2(50,-950) 3(-50,-850) 4(50,-850) 5(-50,-750) 6(50,-750) 7(-50,-650) 8(50,-650) 9(-50,-550) 10(50,-550) 11(-50,-450) 12(50,-450) 13(-50,-350) 14(50,-350) 15(-50,-250) 16(50,-250) 17(-50,-150) 18(50,-150) 19(-50,-50) 20(50,-50) 21(-50,50) 22(50,50) 23(-50,150) 24(50,150) 25(-50,250) 26(50,250) 27(-50,350) 28(50,350) 29(-50,450) 30(50,450) 31(-50,550) 32(50,550) 33(-50,650) 34(50,650) 35(-50,750) 36(50,750) 37(-50,850) 38(50,850) 39(-50,950) 40(50,950)
  silkscreen extent -113,-1000 100,1000, body extent -100,-1000 100,1000, height 230
RESC1005X40N [mm]
  rect 0.57x0.62 smd: 1(-0.48,0) 2(0.48,0)
  body extent -0.5,-0.25 0.5,0.25, height 0.35
RESC1608X50N [mm] "Chip Resistor, EIA 0603, Metric 1608, Body 1.6x0.8mm, IPC Medium Density"
  rect 0.72x0.99 smd: 1(-0.69,0) 2(0.69,0)
  body extent -0.87,-0.47 0.88,0.48, height 0.5
RESC3316X76N [mm]
  rect 1.2x1.75 smd: 1(-1.5,0) 2(1.5,0)
  silkscreen extent -0.55,-0.8 0.55,0.8, body extent -1.73,-0.86 1.73,0.86, height 0.6
SIM7100-8-1-15-00-A_revA [mm] "Micro SIM Card Connector - Push-Push Type, 8 Pin, SMT, 1.50mm Profile"
  rect 1.56x2.61 smd: 1(-8.34,5.34) 2(-8.34,-7.29) 3(8.34,-7.29) 4(8.34,5.34)
  rect 0.9x1.35 smd: C1(2.755,8.215) C2(0.215,8.215) C3(-2.325,8.215) C4(-4.865,8.215) C5(1.485,8.215) C6(-1.055,8.215) C7(-3.595,8.215) C8(-6.135,8.215) CD(-7.405,8.215)
  Keep-Out Layer region: 4.615,8.11 7.705,8.11 7.705,-8.89 4.615,-8.89
  Keep-Out Layer region: -5.545,2.91 -4.145,2.91 -4.145,-1.03 -5.545,-1.03
  Keep-Out Layer region: -3.005,2.91 -1.605,2.91 -1.605,-1.03 -3.005,-1.03
  Keep-Out Layer region: -0.465,2.91 0.935,2.91 0.935,-1.03 -0.465,-1.03
  Keep-Out Layer region: 2.075,2.91 3.475,2.91 3.475,-1.03 2.075,-1.03
  Keep-Out Layer region: -5.695,-4.83 -3.995,-4.83 -3.995,-8.41 -5.695,-8.41
  Keep-Out Layer region: -3.155,-4.83 -1.455,-4.83 -1.455,-8.41 -3.155,-8.41
  Keep-Out Layer region: -0.615,-4.83 1.085,-4.83 1.085,-8.41 -0.615,-8.41
  Keep-Out Layer region: 1.925,-4.83 3.625,-4.83 3.625,-8.41 1.925,-8.41
  silkscreen extent -7.88,-8.89 7.88,8.28, body extent -8.37,-8.89 8.37,8.44, height 1.47
SO-16_STM [mil]
  rect 63x20 smd: 1(-104.5,175) 2(-104.5,125) 3(-104.5,75) 4(-104.5,25) 5(-104.5,-25) 6(-104.5,-75) 7(-104.5,-125) 8(-104.5,-175) 9(104.5,-175) 10(104.5,-125) 11(104.5,-75) 12(104.5,-25) 13(104.5,25) 14(104.5,75) 15(104.5,125) 16(104.5,175)
  silkscreen extent -127,-202 84,222, body extent -122,-197 122,197, height 69
SOD3715X145N [mm] "SOD Diode (SOD-123); 2.70mm W X 1.55mm L X 1.45mm H body, IPC Medium Density"
  rect 1x0.8 smd: 1(1.8,0) 2(-1.8,0)
  silkscreen extent -2.17,-0.8 1.35,1.02, body extent -1.95,-0.85 1.95,0.85, height 1.45
SOIC127P600X173-8N [mm]
  rect 1.6x0.6 smd: 1(-2.7,1.905) 2(-2.7,0.635) 3(-2.7,-0.635) 4(-2.7,-1.905) 5(2.7,-1.905) 6(2.7,-0.635) 7(2.7,0.635) 8(2.7,1.905)
  silkscreen extent -3.29,-2.45 1.58,2.61, body extent -3.11,-2.5 3.11,2.5, height 1.75
SOIC127P600X175-8N [mm]
  rrect25% 1.97x0.59 smd: 1(-2.475,1.905) 2(-2.475,0.635) 3(-2.475,-0.635) 4(-2.475,-1.905) 5(2.475,-1.905) 6(2.475,-0.635) 7(2.475,0.635) 8(2.475,1.905)
  silkscreen extent -4.54,-2.52 2,2.59, body extent -2.45,-3 2.45,3, height 1.75
SOIC127P602X173-8N [mm]
  rect 1.55x0.65 smd: 1(-2.725,1.905) 2(-2.725,0.635) 3(-2.725,-0.635) 4(-2.725,-1.905) 5(2.725,-1.905) 6(2.725,-0.635) 7(2.725,0.635) 8(2.725,1.905)
  silkscreen extent -3.5,-2.44 1.6,2.58, body extent -3.01,-2.44 3.01,2.44, height 1.73
SON80P400X400X100-9N-D [mm]
  rect 1x0.4 smd: 1(-1.85,1.2) 2(-1.85,0.4) 3(-1.85,-0.4) 4(-1.85,-1.2) 5(1.85,-1.2) 6(1.85,-0.4) 7(1.85,0.4) 8(1.85,1.2)
  rect 2.35x3.25 smd: 9(0,0)
  silkscreen extent -2.47,1.78 -2.22,2.02, body extent -2.05,-2 2.05,2, height 1
SOP65P640X120-16N [mm]
  rect 1.475x0.45 smd: 1(-2.938,2.275) 2(-2.938,1.625) 3(-2.938,0.975) 4(-2.938,0.325) 5(-2.938,-0.325) 6(-2.938,-0.975) 7(-2.938,-1.625) 8(-2.938,-2.275) 9(2.938,-2.275) 10(2.938,-1.625) 11(2.938,-0.975) 12(2.938,-0.325) 13(2.938,0.325) 14(2.938,0.975) 15(2.938,1.625) 16(2.938,2.275)
  silkscreen extent -3.67,-2.5 1.85,2.85, body extent -3.2,-2.5 3.2,2.5, height 1.2
SOT95P230X110-3N [mm]
  rect 1x0.6 smd: 1(-1.15,0.95) 2(-1.15,-0.95) 3(1.15,0)
  silkscreen extent -1.4,-1.45 0.33,1.67, body extent -1.25,-1.5 1.25,1.5, height 1.09
SOT95P280X100-6N [mm] "SOT23, 0.95mm pitch; 6 pin, 1.625mm W X 2.90mm L X 1.00mm H body, IPC Medium Density"
  rect 1.1x0.55 smd: 1(-1.35,0.95) 2(-1.35,0) 3(-1.35,-0.95) 4(1.35,-0.95) 5(1.35,0) 6(1.35,0.95)
  silkscreen extent -1.77,-1.45 0.48,1.87, body extent -1.4,-1.5 1.4,1.5, height 1
SOT-23-5 [mm] "SOT-23-5"
  rect 1.1x0.6 smd: 1(-1.376,0.928) 2(-1.376,-0.022) 3(-1.376,-0.972) 4(1.274,-0.972) 5(1.274,0.928)
  silkscreen extent -1.65,-1.55 0.75,1.69, body extent -1.56,-1.54 1.43,1.5, height 1.45
SSQC_BEL [mil]
  rect 97x132 smd: 1(-118,-5) 2(108,-5)
  silkscreen extent -57,-76 47,66, body extent -147,-71 147,61, height 123
T_CAPC0603X33N [mm] "Ceramic Capacitor 0603 (1608 metric), max height 0.9mm"
  rect 0.7x0.85 smd: 1(-0.775,0) 2(0.775,0)
  body extent -0.8,-0.4 0.8,0.4, height 0.9
T_CAPC0805X125N [mm] "Ceramic Capacitor 0805 (2012 metric), max height 1.25mm"
  rect 1x1.2 smd: 1(-0.95,0) 2(0.95,0)
  body extent -1,-0.62 1,0.63, height 1
T_CAPC1206X180N [mm] "Ceramic Capacitor 1206 (3216 metric), max height 1.8mm"
  rect 1.524x1.7 smd: 1(-1.397,0) 2(1.397,0)
  body extent -1.6,-0.8 1.6,0.8, height 1
T_CnK_KMR211GLFS [mm] "Microminiature Tact Switch for SMT"
  rect 0.9x1 smd: 1(2.05,0.8) 2(2.05,-0.8) 3(-2.05,0.8) 4(-2.05,-0.8)
  rect 1.7x0.55 smd: 5(0,1.43)
  silkscreen extent -2.11,-1.51 2.52,1.72, body extent -2.3,-1.51 2.3,1.49, height 2.12
T_DIOM_TO277A [mm] "Molded Diode, 3-Leads, Body 4.75x6.65mm, IPC Medium Density"
  rect 1.35x1.5 smd: A1(3.805,1.065) A2(3.805,-1.065)
  rect 4.9x4.85 smd paste-0.5: K(0,0)
  silkscreen extent -2.79,-2.72 4.83,2.72, body extent -2.28,-2.38 4.37,2.38, height 1.2
T_INDM102102X45N [mm]
  rect 3.4x2.4 smd: 1(0,-4.1) 2(0,4.1)
  silkscreen extent -5.52,-5.52 5.52,5.52, body extent -5.25,-5.25 5.25,5.25, height 4.5
T_INDM120120X80N [mm]
  rect 5.4x2.9 smd: 1(0,-4.95) 2(0,4.95)
  silkscreen extent -6.2,-6.2 6.2,6.2, body extent -6,-6 6,6, height 6
T_Laird_35F0121-0SR-10 [mm] "Power supply FB 10A"
  rect 2.77x1.47 smd: 1(-1.79,0) 2(1.79,0)
  silkscreen extent -2.73,-1.6 2.73,1.6, body extent -2.54,-1.53 2.54,1.53, height 3.05
T_Littelfuse_0458 [mm] "Fast Fuse"
  rect 1.185x2.05 smd: 1(-1.232,0) 2(1.232,0)
  silkscreen extent -0.4,-0.82 0.4,0.82, body extent -1.51,-0.8 1.51,0.8, height 1.1
T_LITTLEFUSE_SMAJ30CA [mm] "Bidirectional ESD protection"
  rect 2.1x1.8 smd: 1(-2.2,0) 2(2.2,0)
  silkscreen extent -3.77,-1.35 2.55,1.35, body extent -2.25,-1.4 2.25,1.4, height 2.29
T_MountingHoles [mm] "PCB Mounting Holes"
  round 5 hole 3.2: 1(0,0)
T_Murata_DLW21SN900SQ2 [mm] "Common Mode Choke"
  rrect50% 0.75x0.42 smd: 1(-0.9,0.4) 2(0.9,0.4) 3(0.9,-0.4) 4(-0.9,-0.4)
  silkscreen extent -0.34,-0.55 0.34,0.55, body extent -1,-0.6 1,0.6, height 1.2
T_Pulse_J00-0065NL [mm] "RJ45 Connector"
  round 1.5 hole 0.95: 1(12.575,-17.15) 2(11.305,-19.69) 3(10.035,-17.15) 4(8.765,-19.69) 5(7.495,-17.15) 6(6.225,-19.69) 7(4.955,-17.15) 8(3.685,-19.69)
  round 1.5 hole 1.02: 9(14.455,-5.9) 10(11.915,-7.42) 11(4.345,-5.9) 12(1.805,-7.42)
  round 2.1 hole 1.63: S1(0.255,-13.85) S2(16.005,-13.85)
  round 3.2 hole 3.2 unplated: ""(2.415,-10.8) ""(13.845,-10.8)
  silkscreen extent 0,-21.59 16.26,0, body extent 0.19,-21.75 16.07,0.09, height 13.32
T_RESC0603X30N [mm] "Film Resistor 0603 (1608 metric), max height 0.45mm"
  rect 0.65x0.85 smd: 1(-0.725,0) 2(0.725,0)
  body extent -0.85,-0.4 0.85,0.4, height 0.56
T_RESC3216X760N [mm]
  rect 1.2x1.4 smd: 1(-1.7,0) 2(1.7,0)
  silkscreen extent -0.55,-0.88 0.55,0.88, body extent -1.6,-0.8 1.6,0.8, height 0.6
T_Resistor_Array_X4 [mm] "Resistor Array 0.8mm"
  rect 0.5x0.6 smd: 1(0,0) 2(0,-0.8) 3(0,-1.6) 4(0,-2.4) 5(1.3,0) 6(1.3,-0.8) 7(1.3,-1.6) 8(1.3,-2.4)
  silkscreen extent -0.47,-2.92 1.77,0.52, body extent -0.15,-2.8 1.45,0.4, height 0.5
T_SOT50P160X80-3N [mm] "SOT23, 3-Leads, Body 1.7x1.8mm (max), Pitch 0.50mm, IPC Medium Density"
  rect 0.51x0.4 smd: 1(-0.65,0.5) 2(-0.65,-0.5) 3(0.65,0)
  silkscreen extent -0.77,-0.85 0.42,1.37, body extent -0.43,-0.85 0.42,0.85, height 0.8
T_SOT95P285X90-6N [mm]
  rect 1.05x0.5 smd: 1(-1.35,0.95) 2(-1.35,0) 3(-1.35,-0.95) 4(1.35,-0.95) 5(1.35,0) 6(1.35,0.95)
  silkscreen extent -1.57,-1.5 0.5,1.7, body extent -1.4,-1.45 1.4,1.45, height 1.45
T_TI_TPD2EUSB30DRTR [mm] "2 CHANNEL PROTECTION SOLUTION FOR SUPER-SPEED"
  rect 0.3x0.3 smd: 1(-0.425,0.35) 2(-0.425,-0.35) 3(0.425,0)
  silkscreen extent -0.88,0.3 -0.78,0.4, body extent -0.43,-0.5 0.43,0.5, height 0.5
T_TYCO_284512-2 [mm] "Power Connector 3.5mm"
  rect 1.6x1.6 hole 1.2: 1(2.25,8)
  oval 1.6x1.56 hole 1.2: 2(5.75,8)
  silkscreen extent -0.5,0 8.5,9.2, body extent -0.5,0 8.5,9.2, height 7.27
T_TYCO_826936-3 [mm] "Connector; Header; 3 Position"
  rect 1.5x1.5 hole 0.9: 1(0,0)
  round 1.5 hole 0.9: 2(2.54,0) 3(5.08,0)
  silkscreen extent -1.27,-1.73 6.35,1.27, body extent -1.27,-1.27 6.35,1.27, height 8.4
T_Tyco_1473005-1 [mm] "SODIMM Connector"
  rect 2x0.35 smd: 1(0,0) 2(8.2,-0.3) 3(0,-0.6) 4(8.2,-0.9) 5(0,-1.2) 6(8.2,-1.5) 7(0,-1.8) 8(8.2,-2.1) 9(0,-2.4) 10(8.2,-2.7) 11(0,-3) 12(8.2,-3.3) 13(0,-3.6) 14(8.2,-3.9) 15(0,-4.2) 16(8.2,-4.5) 17(0,-4.8) 18(8.2,-5.1) 19(0,-5.4) 20(8.2,-5.7) 21(0,-6) 22(8.2,-6.3) 23(0,-6.6) 24(8.2,-6.9) 25(0,-7.2) 26(8.2,-7.5) 27(0,-7.8) 28(8.2,-8.1) 29(0,-8.4) 30(8.2,-8.7) 31(0,-9) 32(8.2,-9.3) 33(0,-9.6) 34(8.2,-9.9) 35(0,-10.2) 36(8.2,-10.5) 37(0,-10.8) 38(8.2,-11.1) 39(0,-11.4) 40(8.2,-11.7) 41(0,-15.6) 42(8.2,-15.9) 43(0,-16.2) 44(8.2,-16.5) 45(0,-16.8) 46(8.2,-17.1) 47(0,-17.4) 48(8.2,-17.7) 49(0,-18) 50(8.2,-18.3) 51(0,-18.6) 52(8.2,-18.9) 53(0,-19.2) 54(8.2,-19.5) 55(0,-19.8) 56(8.2,-20.1) 57(0,-20.4) 58(8.2,-20.7) 59(0,-21) 60(8.2,-21.3) 61(0,-21.6) 62(8.2,-21.9) 63(0,-22.2) 64(8.2,-22.5) 65(0,-22.8) 66(8.2,-23.1) 67(0,-23.4) 68(8.2,-23.7) 69(0,-24) 70(8.2,-24.3) 71(0,-24.6) 72(8.2,-24.9) 73(0,-25.2) 74(8.2,-25.5) 75(0,-25.8) 76(8.2,-26.1) 77(0,-26.4) 78(8.2,-26.7) 79(0,-27) 80(8.2,-27.3) 81(0,-27.6) 82(8.2,-27.9) 83(0,-28.2) 84(8.2,-28.5) 85(0,-28.8) 86(8.2,-29.1) 87(0,-29.4) 88(8.2,-29.7) 89(0,-30) 90(8.2,-30.3) 91(0,-30.6) 92(8.2,-30.9) 93(0,-31.2) 94(8.2,-31.5) 95(0,-31.8) 96(8.2,-32.1) 97(0,-32.4) 98(8.2,-32.7) 99(0,-33) 100(8.2,-33.3) 101(0,-33.6) 102(8.2,-33.9) 103(0,-34.2) 104(8.2,-34.5) 105(0,-34.8) 106(8.2,-35.1) 107(0,-35.4) 108(8.2,-35.7) 109(0,-36) 110(8.2,-36.3) 111(0,-36.6) 112(8.2,-36.9) 113(0,-37.2) 114(8.2,-37.5) 115(0,-37.8) 116(8.2,-38.1) 117(0,-38.4) 118(8.2,-38.7) 119(0,-39) 120(8.2,-39.3) 121(0,-39.6) 122(8.2,-39.9) 123(0,-40.2) 124(8.2,-40.5) 125(0,-40.8) 126(8.2,-41.1) 127(0,-41.4) 128(8.2,-41.7) 129(0,-42) 130(8.2,-42.3) 131(0,-42.6) 132(8.2,-42.9) 133(0,-43.2) 134(8.2,-43.5) 135(0,-43.8) 136(8.2,-44.1) 137(0,-44.4) 138(8.2,-44.7) 139(0,-45) 140(8.2,-45.3) 141(0,-45.6) 142(8.2,-45.9) 143(0,-46.2) 144(8.2,-46.5) 145(0,-46.8) 146(8.2,-47.1) 147(0,-47.4) 148(8.2,-47.7) 149(0,-48) 150(8.2,-48.3) 151(0,-48.6) 152(8.2,-48.9) 153(0,-49.2) 154(8.2,-49.5) 155(0,-49.8) 156(8.2,-50.1) 157(0,-50.4) 158(8.2,-50.7) 159(0,-51) 160(8.2,-51.3) 161(0,-51.6) 162(8.2,-51.9) 163(0,-52.2) 164(8.2,-52.5) 165(0,-52.8) 166(8.2,-53.1) 167(0,-53.4) 168(8.2,-53.7) 169(0,-54) 170(8.2,-54.3) 171(0,-54.6) 172(8.2,-54.9) 173(0,-55.2) 174(8.2,-55.5) 175(0,-55.8) 176(8.2,-56.1) 177(0,-56.4) 178(8.2,-56.7) 179(0,-57) 180(8.2,-57.3) 181(0,-57.6) 182(8.2,-57.9) 183(0,-58.2) 184(8.2,-58.5) 185(0,-58.8) 186(8.2,-59.1) 187(0,-59.4) 188(8.2,-59.7) 189(0,-60) 190(8.2,-60.3) 191(0,-60.6) 192(8.2,-60.9) 193(0,-61.2) 194(8.2,-61.5) 195(0,-61.8) 196(8.2,-62.1) 197(0,-62.4) 198(8.2,-62.7) 199(0,-63) 200(8.2,-63.3)
  rect 4.6x4.5 smd: BE1(16.1,0.75) BE2(16.1,-64.35)
  round 1.1 hole 1.1 unplated: ""(4.1,-65.05)
  round 1.6 hole 1.6 unplated: ""(4.1,1.75)
  round 1.8 hole 1.8 unplated: ""(10.1,-63.45) ""(10.1,0.15)
  round 2.5 hole 2.5 unplated: ""(37.1,-63.45) ""(37.1,0.15)
  round 1.5 hole 0.9: ""(40.6,-63.45) ""(40.6,0.15)
  silkscreen extent -0.64,-67.9 25.27,4.75, body extent -0.9,-67.4 25.15,4.1, height 5.22
T_Wurth_693071010811 [mm] "MicroSD Holder, Push-Pust Type,"
  rect 0.8x1.5 smd: 1(-8.94,10.7) 2(-7.84,10.3) 3(-6.74,10.7) 4(-5.64,10.9) 5(-4.54,10.7) 6(-3.44,10.9) 7(-2.34,10.7) 8(-1.24,10.7)
  rect 1.8x1.4 smd: CD1(-2.05,0.4) CD2(-7.75,0.4)
  rect 1.4x1.9 smd: S1(-0.45,13.55) S2(-13.6,14.55)
  silkscreen extent -14.55,-0.56 0.51,15.75, body extent -14,0 0,19.65, height 1.83
VR5 [mm] "Thru-Hole; 3 Leads"
  rect 1.2x1.2 hole 0.7: 1(-2.54,0)
  round 1.2 hole 0.7: 2(0,0) 3(2.54,0)
  silkscreen extent -5.08,-2.54 6.35,2.54
XCVR_RFM95W-915S2 [mm]
  rect 3x1.4 smd: 1(-7.7,7) 2(-7.7,5) 3(-7.7,3) 4(-7.7,1) 5(-7.7,-1) 6(-7.7,-3) 7(-7.7,-5) 8(-7.7,-7) 9(7.7,-7) 10(7.7,-5) 11(7.7,-3) 12(7.7,-1) 13(7.7,1) 14(7.7,3) 15(7.7,5) 16(7.7,7)
  silkscreen extent -10.25,-8 8,8, body extent -7.87,-8.13 8.13,7.87, height 1.8